# Altium PCB Heart rate sensor.PcbDoc
Units mm, origin at the board's own origin, x right, y up, seen from the top; angles counter-clockwise.
Board outline 27.18 x 6.86 mm, 4 copper layers (Top Layer, Layer 1, Layer 2, Bottom Layer), stack 0.603 mm thick; 7 components, 7 nets, 29 pads, 7 vias.
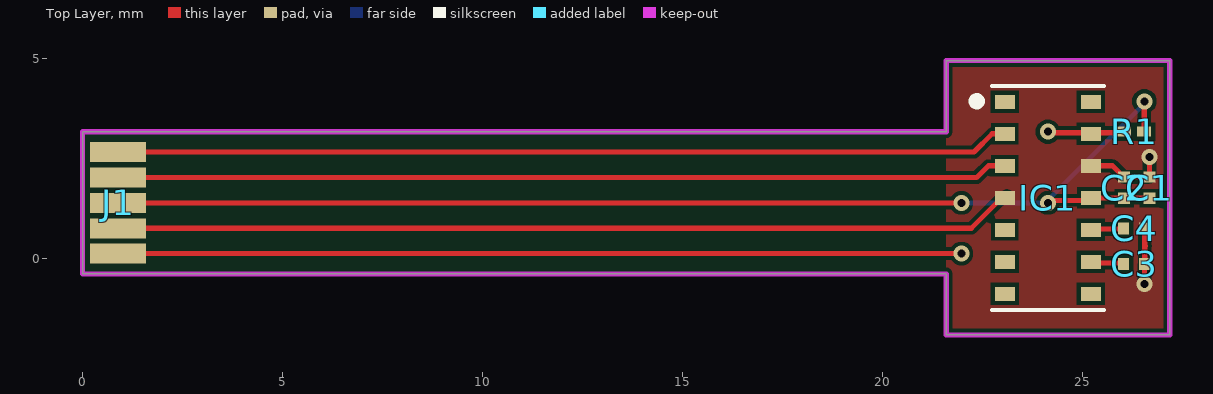
[diagram p0: Top Layer view]
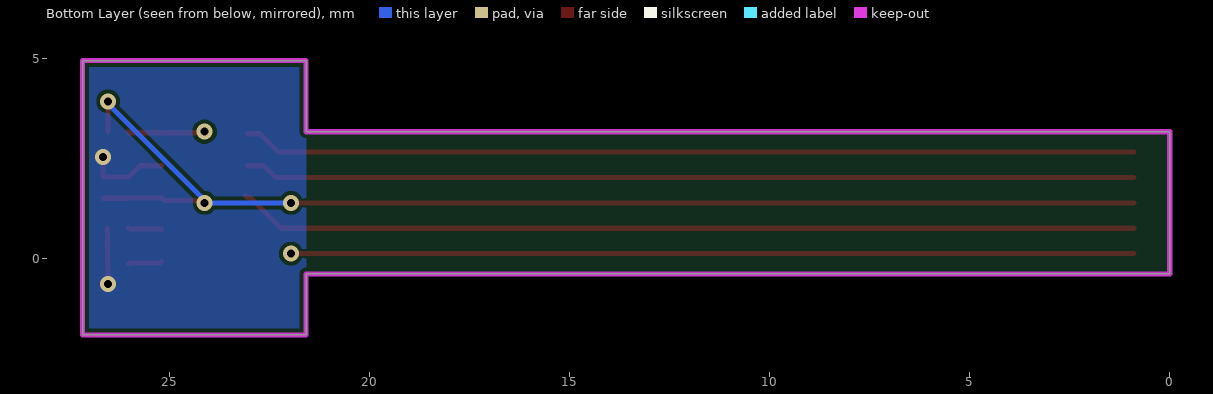
[diagram p1: Bottom Layer view, seen from below]
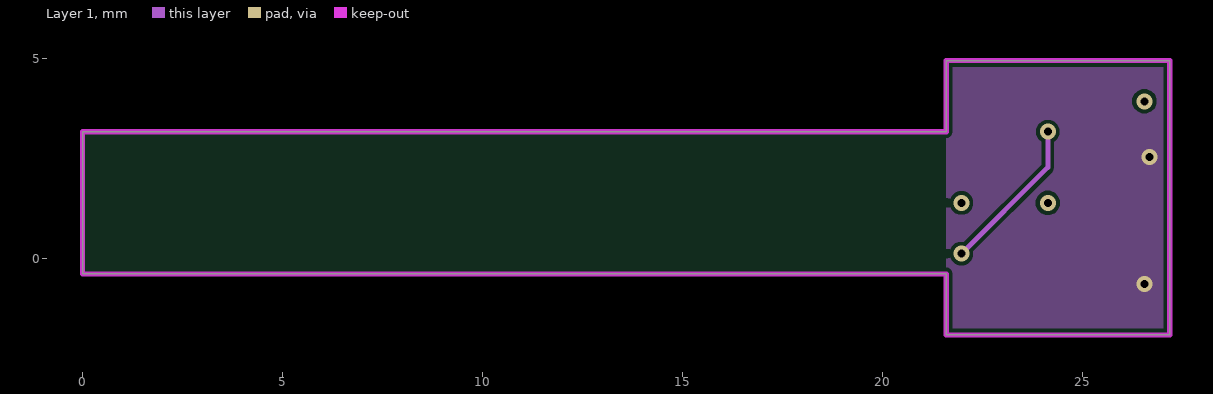
[diagram p2: Layer 1]
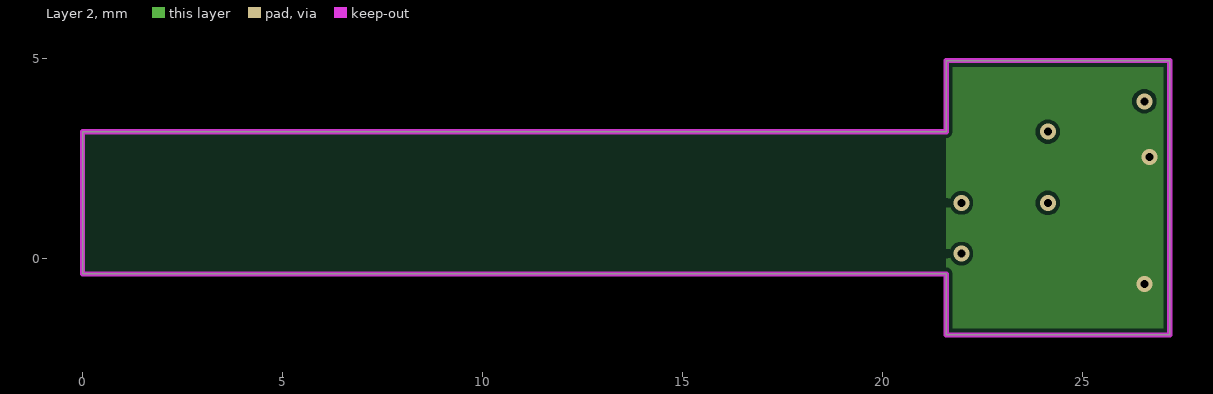
[diagram p3: Layer 2]
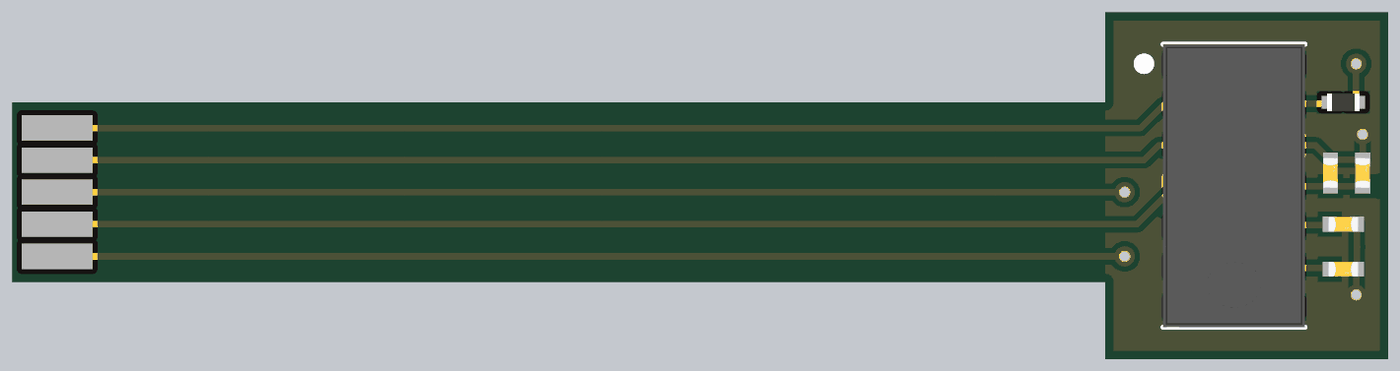
[diagram p4: 3D render of the assembled board from above, using the file's embedded part models]

## Layer stack, top to bottom
Top Solder: solder mask 0.012, FC-001, Dk 4
Top Solder: solder mask 0.0102, Solder Resist, Dk 3.5
Top Layer: signal copper 0.0356
Dielectric 2: prepreg 0.0711, PP-006, Dk 4.1
Layer 1: signal copper 0.035
Dielectric 1: dielectric 0.32, FR-4, Dk 4.8
Layer 2: signal copper 0.035
Dielectric 3: prepreg 0.0711, PP-006, Dk 4.1
Bottom Layer: signal copper 0.0356
Flex Bottom Coverlay: solder mask 0.0102, Solder Resist, Dk 3.5
Flex Bottom Coverlay: solder mask 0.012, FC-001, Dk 4

## Board outline
0,-0.381 0,3.175 21.59,3.175 21.59,4.953 27.178,4.953 27.178,-1.905 21.59,-1.905 21.59,-0.381
board region Rigid: 21.59,4.953 27.178,4.953 27.178,-1.905 21.59,-1.905
board region Flex: 21.59,-0.381 0,-0.381 0,3.175 21.59,3.175

## Design rules (kind name [scope] priority, off if disabled: settings)
Clearance [All] p1: gap=0.1 ignorepadtopadclearanceinfootprint=FALSE
PolygonConnect [All] p1: connectstyle=Direct reliefconductorwidth=0.254 reliefentries=4 polygonreliefangle="90 Angle" airgapwidth=0.254
RoutingVias [All] p1: holewidth=0.3 width=0.6 viastyle="Through Hole" minholewidth=0.2 minwidth=0.4 maxholewidth=0.5 maxwidth=1
SolderMaskExpansion [All] p1: expansion=0.102 istentingtop=FALSE
Width [All] p1: maxlimit=1 minlimit=0.1 preferedwidth=0.127
30 further rules are at their usual default settings.

## Components (designator, comment, footprint, x,y, rotation, side; value= is the part's Value field where it differs from the comment)
C1 "CC0201KRX7R8BB102" FP-CC0201-BA-MFG 26.67,1.778 r90 top value="1.0 nF"
C2 "CC0201KRX7R8BB102" FP-CC0201-BA-MFG 26.035,1.778 r90 top value="1.0 nF"
C3 "CC0201KRX7R8BB102" FP-CC0201-BA-MFG 26.289,-0.127 r0 top value="1.0 nF"
C4 "CC0201KRX7R8BB102" FP-CC0201-BA-MFG 26.289,0.762 r0 top value="1.0 nF"
IC1 "MAX30100EFD+T" MAX30100EFD 24.13,1.524 r0 top
J1 "PCB connector" PCBComponent_1 0.889,2.667 r0 top
R1 "CRCW02010000Z0ED" RESC0603X28X15LL5T05 26.289,3.175 r180 top

## Footprints (in the part's own frame and the unit in brackets; to place one, negate y for a bottom-side part, rotate by r counter-clockwise, add the part's x,y. Pads: shape width x height; smd on the part's side, far side on the other; paste and mask are expansions set on the pad)
FP-CC0201-BA-MFG [mm]
  rect 0.28x0.3 smd paste+0 mask+0: 1(-0.265,0) 2(0.265,0)
  body extent -0.51,-0.27 0.51,0.27, height 0.25
MAX30100EFD [mm]
  rect 0.5x0.35 smd: 1(-1.075,2.4) 2(-1.075,1.6) 3(-1.075,0.8) 4(-1.075,0) 5(-1.075,-0.8) 6(-1.075,-1.6) 7(-1.075,-2.4) 8(1.075,-2.4) 9(1.075,-1.6) 10(1.075,-0.8) 11(1.075,0) 12(1.075,0.8) 13(1.075,1.6) 14(1.075,2.4)
  silkscreen extent -1.87,-2.8 1.4,2.8, body extent -1.4,-2.8 1.4,2.8, height 1.27
PCBComponent_1 [mm]
  rect 1.4x0.5 smd: 1(0,0) 2(0,-0.635) 3(0,-1.27) 4(0,-1.905) 5(0,-2.54)
RESC0603X28X15LL5T05 [mm] "Chip Resistor, 2-Leads, Body 0.65x0.35mm, IPC High Density"
  rect 0.35x0.25 smd: 1(-0.25,0) 2(0.25,0)
  body extent -0.33,-0.18 0.33,0.18, height 0.28

## Part data
C1: library part CMP-03422-000456-1, "CAP CER X7R 0201", Capacitance=1u, Manufacturer=Yageo, Package=CC0201-BA, Temperature="-55°C to +85°C", Temperature Characteristic=X7R, Temperature Coefficient=15%, Temperature Range High=+85°C, Temperature Range Low=-55°C, Tolerance=0.1, Voltage Rating="25 V", Automotive=No, Category=Cap, ComponentLink2Description=Datasheet, ComponentLink2URL=http://www.yageo.com/documents/recent/UPY-GPHC_X5R_4V-to-50V_25.pdf, Device Class L1="Passive Components", Device Class L2=Capacitors, Device Class L3="Ceramic Capacitors", Digikey Description="CAP CER 1000PF 25V X7R 0201", Footprint Url=http://www.yageo.com/exep/pages/download/literatures/UPY-C_GEN_24.pdf, Height=0.33mm, Lead Free=Yes, Manufacturer Part Number=CC0201KRX7R8BB102, Material=Ceramic, Mouser Description="Multilayer Ceramic Capacitors MLCC - SMD/SMT 1.0nF 25V X7R 10%", Octopart=https://octopart.com/cc0201krx7r8bb102-yageo-9292631, RoHS=TRUE, Ipc Land Pattern Name=CAPC6030X30
C2 C3 C4: library part CMP-03422-000456-1, "CAP CER X7R 0201", Capacitance=0.1u, Manufacturer=Yageo, Package=CC0201-BA, Temperature="-55°C to +85°C", Temperature Characteristic=X7R, Temperature Coefficient=15%, Temperature Range High=+85°C, Temperature Range Low=-55°C, Tolerance=0.1, Voltage Rating="25 V", Automotive=No, Category=Cap, ComponentLink2Description=Datasheet, ComponentLink2URL=http://www.yageo.com/documents/recent/UPY-GPHC_X5R_4V-to-50V_25.pdf, Device Class L1="Passive Components", Device Class L2=Capacitors, Device Class L3="Ceramic Capacitors", Digikey Description="CAP CER 1000PF 25V X7R 0201", Footprint Url=http://www.yageo.com/exep/pages/download/literatures/UPY-C_GEN_24.pdf, Height=0.33mm, Lead Free=Yes, Manufacturer Part Number=CC0201KRX7R8BB102, Material=Ceramic, Mouser Description="Multilayer Ceramic Capacitors MLCC - SMD/SMT 1.0nF 25V X7R 10%", Octopart=https://octopart.com/cc0201krx7r8bb102-yageo-9292631, RoHS=TRUE, Ipc Land Pattern Name=CAPC6030X30
IC1: "Oximeter/Heart Rate Sensor Output", DigiKey Part Number=MAX30100EFD+TTR-ND, Manufacturer_Name="Analog Devices", Supplier Part Number 1=700-MAX30100EFD+T, Datasheet Link=https://datasheets.maximintegrated.com/en/ds/MAX30100.pdf, Height=3mm, Manufacturer_Part_Number=MAX30100EFD+T, Mouser Price/Stock=https://www.mouser.co.uk/ProductDetail/Maxim-Integrated/MAX30100EFD%2b?qs=Y0gyZw6qHXfLbN1SzW9wqw%3D%3D, Supplier 1=Mouser
J1: "PCB pad connector for flexible pcb"
R1: library part CMP-2004-00001-2, "Chip Resistor, 0 Ohm, 0.05 W, -55 to 155 degC, 0201 (0603 Metric), RoHS, Tape and Reel", Case Code (Metric)=0603, Case Code (Imperial)=0201, Max Operating Temperature="155 degC", Min Operating Temperature="-55 degC", Package Quantity=1, Power Rating="50 mW", Resistance=10k, Tolerance=5%, Voltage Rating="30 V", Case\Package=0201, ComponentLink1Description="Manufacturer URL", ComponentLink1URL=http://www.vishay.com/, ComponentLink2Description=Datasheet, ComponentLink2URL=http://www.vishay.com/docs/20052/crcw0201e3.pdf, DatasheetVersion=03/2016, Height="0.23 mm", Length="0.6 mm", Mount="Surface Mount", Mounting Technology="Surface Mount", PackageDescription="2-Pin Surface Mount Device, Body 0.6 x 0.3 mm", PackageReference=0201, packaging="Cut Tape", Radiation Hardening=No, REACH SVHC=Unknown, RoHSCompliant=true, Weight="6E-06 oz", Width="0.3 mm"

## Via types
v1: diameter 0.4, hole 0.2, Top Layer to Bottom Layer, tented both sides, 7 vias

## Nets (pads, with @x,y where several pads share a name; then routed paths per layer and width w, separated by ;. In a path a pad name is that pad's centre, name@x,y a point inside that pad or via, vN(x,y) a via of type N, cw(c..) or ccw(c..) an arc to the next point about the centre after c; other vN are vias at no path point)
3V: C1.1 C2.1 IC1.11 J1.3 R1.1 | length 30.1
  Top Layer w0.127: J1.3 v1(21.971,1.397) ; v1(24.13,1.397) 24.194,1.46 25.141,1.46 IC1.11 25.21,1.519 26.029,1.519 C2.1 C1.1 ; R1.1 26.541,3.177 26.541,3.935 v1(26.543,3.937)
  Bottom Layer w0.127: v1(21.971,1.397) v1(24.13,1.397) 24.13,1.46 26.543,3.873 v1(26.543,3.937)
GND: C1.2 C2.2 C3.2 C4.2 IC1.4 IC1.12 J1.4 | length 26
  Top Layer w0.127: J1.4 22.218,0.762 22.98,1.524 IC1.4 IC1.4@23.108,1.577 ; IC1.12 25.744,2.324 26.025,2.043 C2.2 C1.2 v1(26.67,2.54) ; v1(26.543,-0.635) 26.548,-0.63 26.548,-0.133 C3.2 26.554,0.318 ; C4.2 26.554,0.318 ; 26.565,0.318 26.554,0.318
INT: IC1.13 J1.5 R1.2 | length 27
  Top Layer w0.127: J1.5 v1(21.971,0.127) ; v1(24.13,3.175) 24.156,3.149 25.18,3.149 IC1.13 25.23,3.149 26.013,3.149 R1.2
  Layer 1 w0.127: v1(21.971,0.127) 24.13,2.286 v1(24.13,3.175)
NetC3_1: C3.1 IC1.9 | length 0.8
  Top Layer w0.127: IC1.9 25.23,-0.101 25.998,-0.101 C3.1
NetC4_1: C4.1 IC1.10 | length 0.8
  Top Layer w0.127: IC1.10 25.224,0.743 26.005,0.743 C4.1
SCL: IC1.2 J1.1 | length 22.4
  Top Layer w0.127: J1.1 22.285,2.667 22.742,3.124 IC1.2
SDA: IC1.3 J1.2 | length 22.3
  Top Layer w0.127: J1.2 22.352,2.032 22.644,2.324 IC1.3
pads on no net: IC1.1 IC1.5 IC1.6 IC1.7 IC1.8 IC1.14

## Polygon pours and split planes (outlines as drawn)
GND on Top Layer "GND_L01_P000" (solid, remove dead copper, pour order 0): 21.59,-1.905 21.59,4.953 27.178,4.953 27.178,-1.905
GND on Layer 1 "GND_L02_P001" (solid, remove dead copper, pour order 1): 21.59,4.953 27.178,4.953 27.178,-1.905 21.59,-1.905
GND on Layer 2 "GND_L03_P002" (solid, remove dead copper, pour order 2): 21.59,-1.905 21.59,4.953 27.178,4.953 27.178,-1.905
GND on Bottom Layer "GND_L04_P003" (solid, remove dead copper, pour order 3): 21.59,-1.905 21.59,4.953 27.178,4.953 27.178,-1.905

## Keep-outs
Keep-Out Layer:
  the board outline again, w0.127